# Altium PCB PCB1.pcbdoc (part 1 of 2)
Units mil, origin at the board's own origin, x right, y up, seen from the top; angles counter-clockwise.
Board outline 3346.4 x 3346.4 mil, 4 copper layers (Top Layer, Inner1, Inner2, Bottom Layer), stack 62.5 mil thick; 85 components, 61 nets, 352 pads, 250 vias.
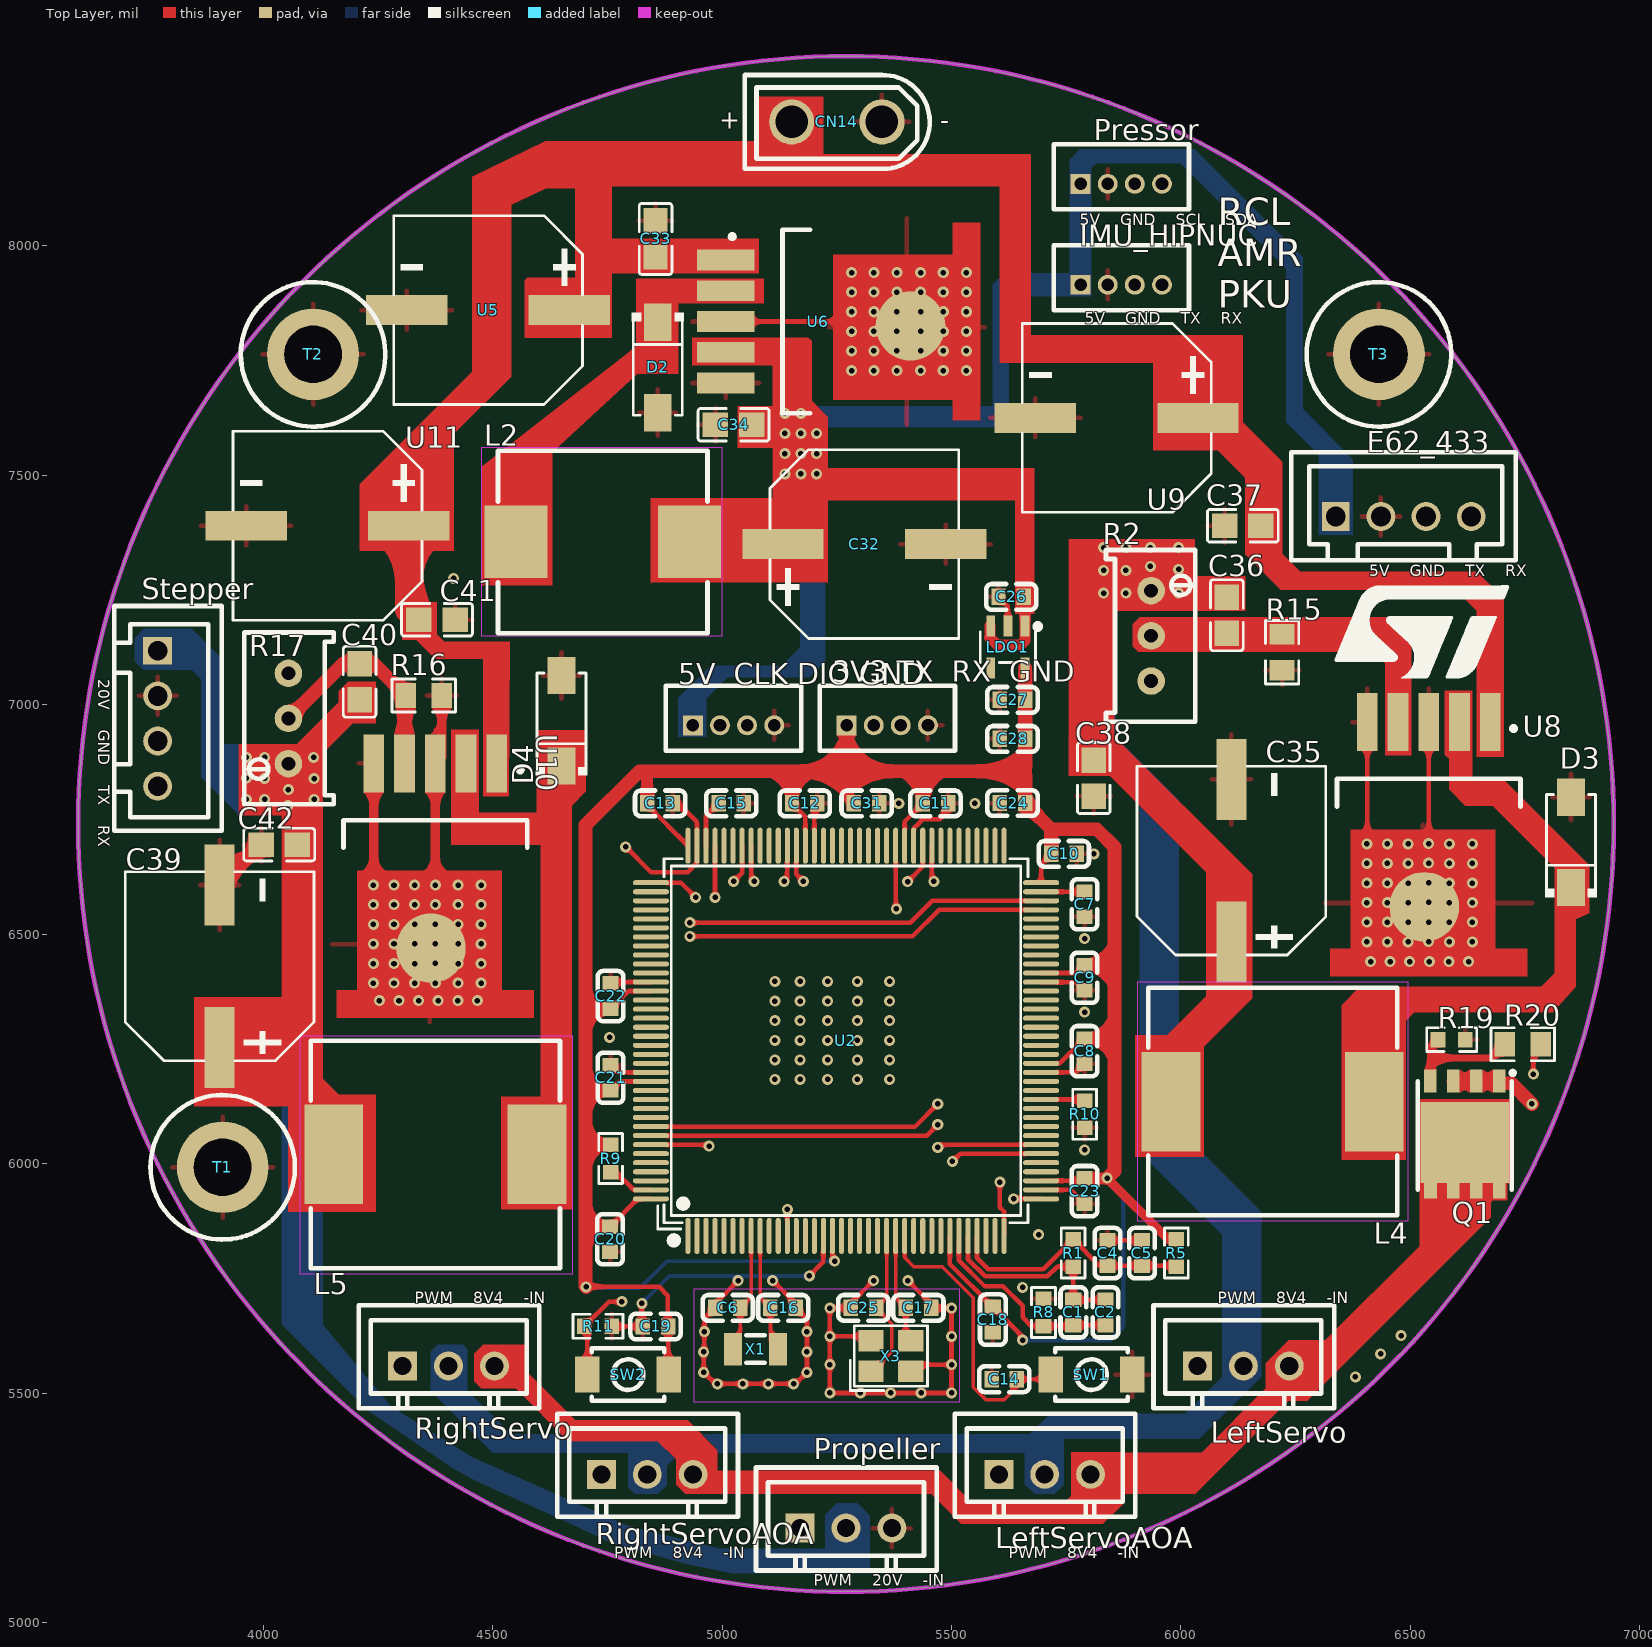
[diagram p0: Top Layer view]
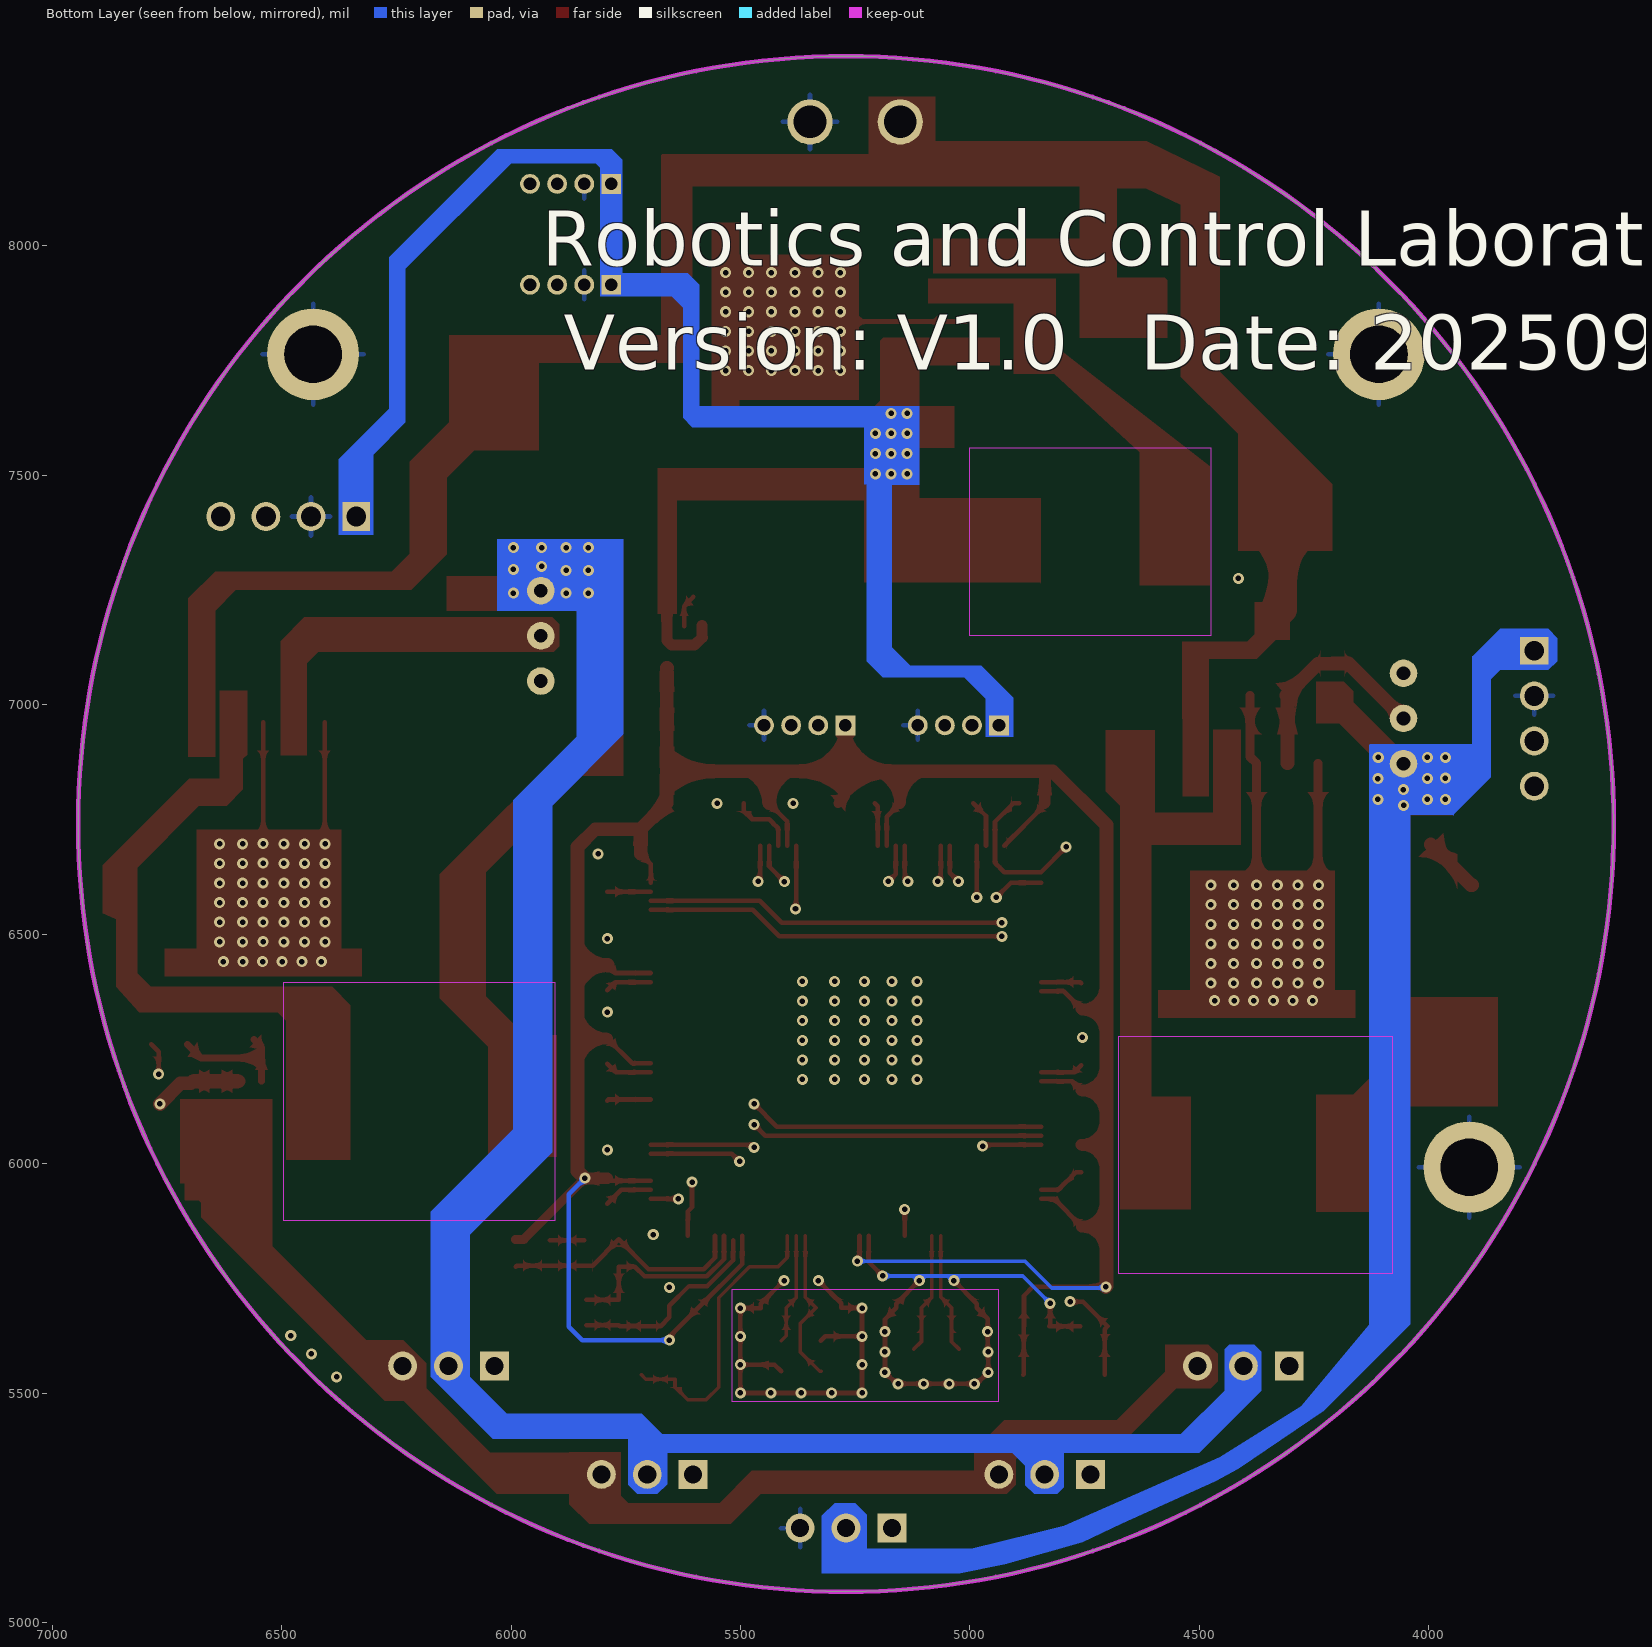
[diagram p1: Bottom Layer view, seen from below]
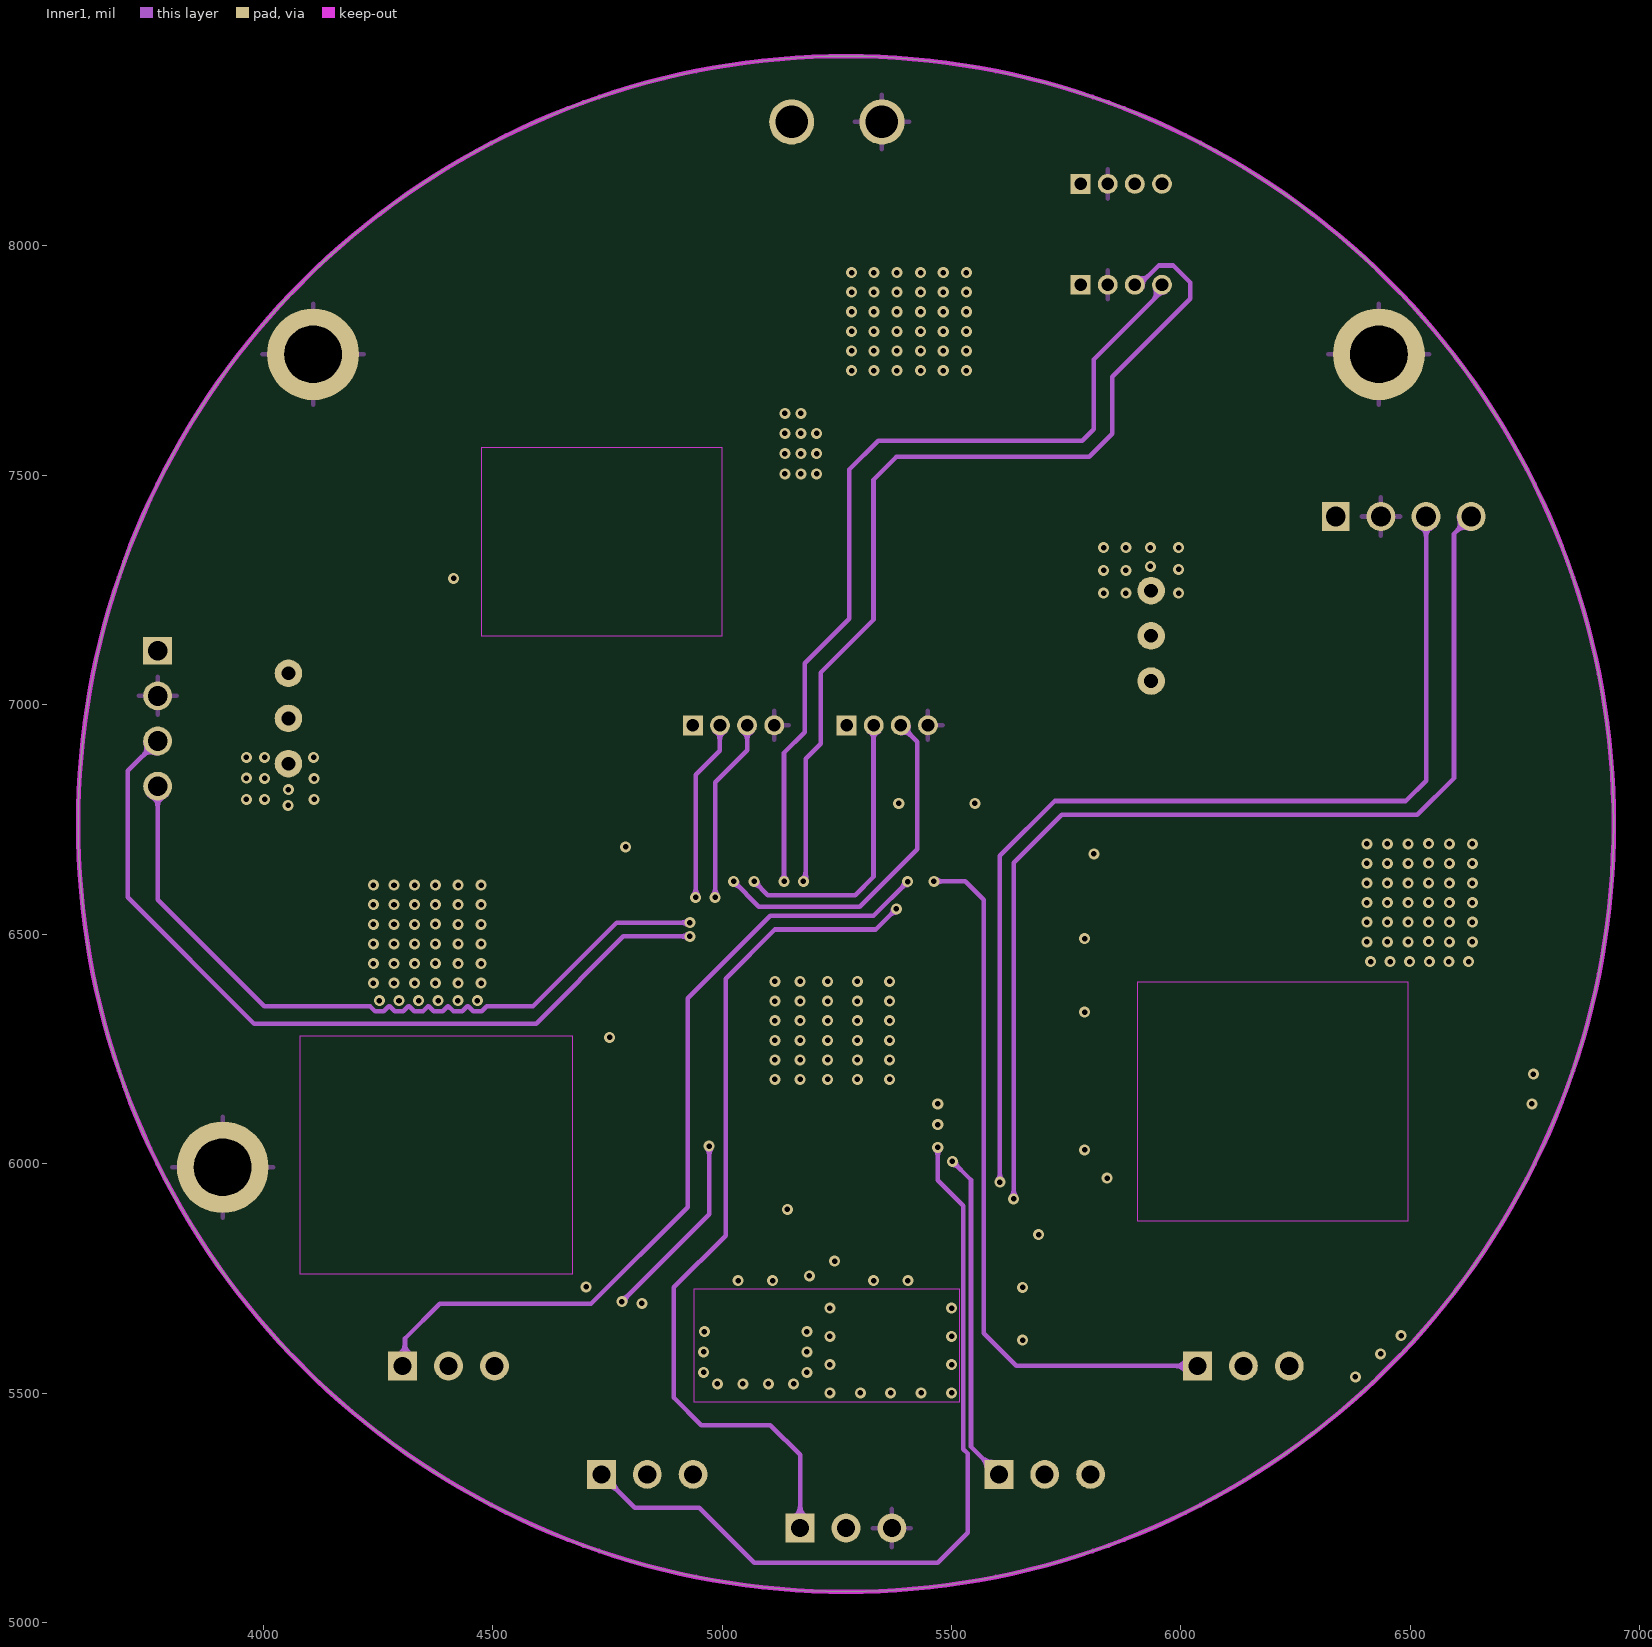
[diagram p2: Inner1]
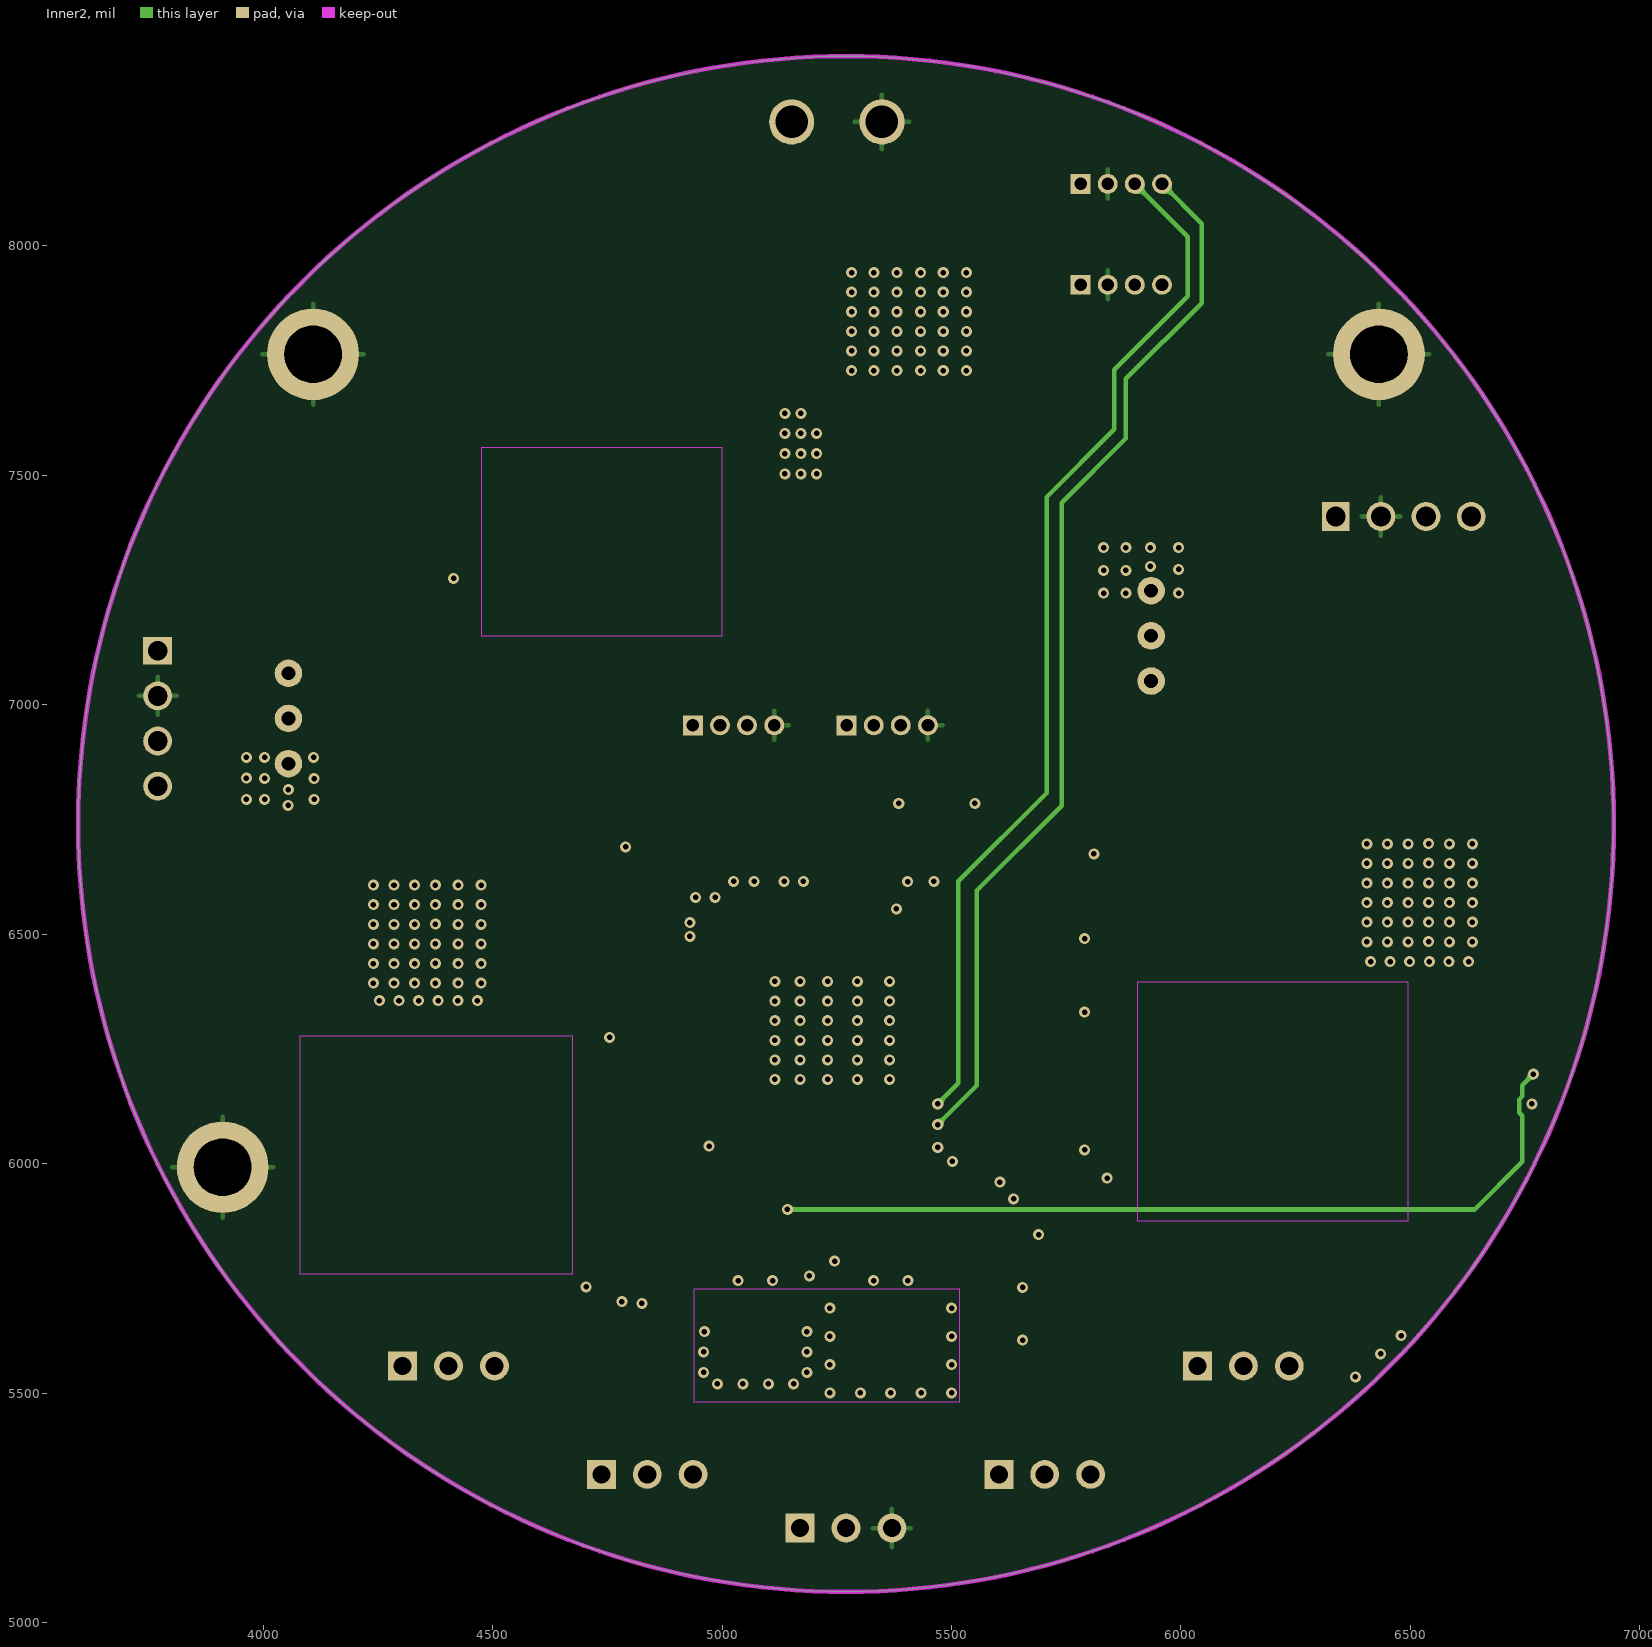
[diagram p3: Inner2]

## Layer stack, top to bottom
Top Layer: signal copper 1.4
Dielectric1: surface 8.3, 7628 RC49% 8.6mil, Dk 0
Inner1: signal copper 0.6
Dielectric2: surface 41.9, 1.1mm H/HOZ Copper, Dk 0
Inner2: signal copper 0.6
Dielectric3: surface 8.3, 7628 RC49% 8.6mil, Dk 0
Bottom Layer: signal copper 1.4

## Board outline
6943.2,6740.2 ccw(c5270,6740.2) 3596.8,6740.2 ccw(c5270,6740.2)

## Design rules (kind name [scope] priority, off if disabled: settings)
BoardOutlineClearance copperThickness1oz [All] p0: genericclearance=10 ignorepadtopadclearanceinfootprint=FALSE except(0: Arc-SplitContinuation Track-SplitContinuation SMDPad-SplitContinuation THPad-SplitContinuation Via-SplitContinuation Fill-SplitContinuation Poly-SplitContinuation Region-SplitContinuation Text-SplitContinuation)
BoardOutlineClearance copperThickness2oz [All] p0: genericclearance=10 ignorepadtopadclearanceinfootprint=FALSE except(0: Arc-SplitContinuation Track-SplitContinuation SMDPad-SplitContinuation THPad-SplitContinuation Via-SplitContinuation Fill-SplitContinuation Poly-SplitContinuation Region-SplitContinuation Text-SplitContinuation)
BoardOutlineClearance Plane_innerPlane [All] p0: genericclearance=10 ignorepadtopadclearanceinfootprint=FALSE except(0: Arc-SplitContinuation Track-SplitContinuation SMDPad-SplitContinuation THPad-SplitContinuation Via-SplitContinuation Fill-SplitContinuation Poly-SplitContinuation Region-SplitContinuation Text-SplitContinuation)
BoardOutlineClearance Copper_copperRegion [All] p0: genericclearance=10 ignorepadtopadclearanceinfootprint=FALSE except(0: Arc-SplitContinuation Track-SplitContinuation SMDPad-SplitContinuation THPad-SplitContinuation Via-SplitContinuation Fill-SplitContinuation Poly-SplitContinuation Region-SplitContinuation Text-SplitContinuation)
BoardOutlineClearance Copper_copperRegion1 [All] p0: genericclearance=10 ignorepadtopadclearanceinfootprint=FALSE except(0: Arc-SplitContinuation Track-SplitContinuation SMDPad-SplitContinuation THPad-SplitContinuation Via-SplitContinuation Fill-SplitContinuation Poly-SplitContinuation Region-SplitContinuation Text-SplitContinuation)
BoardOutlineClearance otherClearance [All] p0: genericclearance=10 ignorepadtopadclearanceinfootprint=FALSE except(0: Arc-SplitContinuation Track-SplitContinuation SMDPad-SplitContinuation THPad-SplitContinuation Via-SplitContinuation Fill-SplitContinuation Poly-SplitContinuation Region-SplitContinuation Text-SplitContinuation)
Clearance copperThickness1oz [All] p1: gap=7 ignorepadtopadclearanceinfootprint=FALSE
Clearance copperThickness2oz [All] p1: gap=7 ignorepadtopadclearanceinfootprint=FALSE
Clearance Plane_innerPlane [All] p1: gap=7 ignorepadtopadclearanceinfootprint=FALSE
Clearance Copper_copperRegion [All] p1: gap=7 ignorepadtopadclearanceinfootprint=FALSE
Clearance Copper_copperRegion1 [All] p1: gap=7 ignorepadtopadclearanceinfootprint=FALSE
Clearance otherClearance [All] p1: gap=7 ignorepadtopadclearanceinfootprint=FALSE
DiffPairsRouting differentialPair [All] p1: maxuncoupledlength=10 minlimit=6 maxlimit=Infinity mostfreqgap=6 toplayer_minwidth=5 toplayer_prefwidth=10 toplayer_maxwidth=100 bottomlayer_minwidth=5 bottomlayer_prefwidth=10 bottomlayer_maxwidth=100 midlayer1_minwidth=5 midlayer1_prefwidth=10 midlayer1_maxwidth=100 midlayer2_minwidth=5 midlayer2_prefwidth=10 midlayer2_maxwidth=100
PasteMaskExpansion pasteMaskExpansion [All] p1: expansion=0
PlaneConnect innerPlane [All] p1: planeconnectstyle=Relief reliefexpansion=20 reliefentries=4 reliefconductorwidth=10 reliefairgap=10
PolygonConnect copperRegion [All] p1: connectstyle=Relief reliefentries=4 reliefconductorwidth=10 polygonreliefangle="90 Angle" airgapwidth=10
PolygonConnect copperRegion1 [All] p1: connectstyle=Direct reliefentries=4 reliefconductorwidth=10 polygonreliefangle="90 Angle" airgapwidth=10
RoutingVias viaSize [All] p1: viastyle="Through Hole" holewidth=12.0078 minholewidth=11.811 maxholewidth=248.0314 width=12.0078 minwidth=11.811 maxwidth=248.0314
SolderMaskExpansion solderMaskExpansion [IsVia] p1: useseparateexpansions=TRUE expansion=-1000 expansionbottom=-1000
SolderMaskExpansion solderMaskExpansion [All] p2: useseparateexpansions=TRUE expansion=2 expansionbottom=2
Width copperThickness1oz [All] p1: maxlimit=100 minlimit=5 preferedwidth=10
Width copperThickness2oz [All] p1: maxlimit=100 minlimit=8 preferedwidth=10

## Components (designator, comment, footprint, x,y, rotation, side; value= is the part's Value field where it differs from the comment)
"3V3 TX  RX  GND" "ZX-ZH1.5-ZZ4P" CONN-TH_4P-P1.50_ZX-ZH1.5-ZZ4P 5360,6955.2 r0 top
"5V  CLK DIO GND" "ZX-ZH1.5-ZZ4P" CONN-TH_4P-P1.50_ZX-ZH1.5-ZZ4P 5025,6955.2 r0 top
C1 "100nF" C0603#1 5765.5,5675.7 r90 top
C2 "1uF" C0603#1 5835.5,5675.7 r90 top
C4 "100nF" C0603#1 5840,5805.2 r90 top
C5 "1uF" C0603#1 5915,5805.2 r90 top
C6 "10pF" C0603#2 5012.4,5685.8 r180 top locked
C7 "2.2uF" C0603#2 5790,6565.2 r270 top
C8 "100nF" C0603#1 5790,6245.2 r90 top
C9 "100nF" C0603#1 5790,6405.2 r90 top
C10 "100nF" C0603#3 5745,6675.2 r180 top
C11 "100nF" C0603#3 5465,6785.2 r180 top
C12 "100nF" C0603#3 5180,6785.2 r180 top
C13 "100nF" C0603#3 4865,6785.2 r180 top
C14 "100nF" C0603#3 5615,5530.2 r180 top
C15 "2.2uF" C0603#1 5019.9,6785.2 r0 top
C16 "10pF" C0603#2 5132.9,5685.8 r0 top locked
C17 "20pF" C0603#1 5427.9,5685.8 r180 top locked
C18 "100nF" C0603#1 5590,5660.2 r90 top
C19 "100nF" C0603#3 4855,5645.2 r0 top
C20 "100nF" C0603#1 4755.9,5835.2 r90 top
C21 "100nF" C0603#1 4757,6187 r270 top
C22 "100nF" C0603#2 4757,6365.2 r270 top
C23 "100nF" C0603#1 5790,5940.2 r90 top
C24 "10uF" C0603#2 5632.9,6785.8 r0 top
C25 "20pF" C0603#1 5307.9,5685.8 r180 top locked
C26 "1uF" C0603#3 5630,7235.2 r0 top
C27 "1uF" C0603#2 5632.9,7010.8 r0 top
C28 "100nF" C0603#2 5632.9,6925.8 r0 top
C31 "100nF" C0603#3 5315,6785.2 r180 top
C32 "330uF" CAP-SMD_BD10.0-L10.3-W10.3-LS10.8-FD#1 5310,7350.2 r0 top
C33 "100nF" C0805#1 4855,8015.2 r270 top
C34 "100nF" C0805#2 5025,7610.2 r0 top
C35 "330uF" CAP-SMD_BD10.0-L10.3-W10.3-LS10.8-FD#2 6110,6660.2 r90 top
C36 "100nF" C0805#1 6100,7195.2 r270 top
C37 "100nF" C0805#2 6135,7390.2 r0 top
C38 "100nF" C0805#3 5810,6840.2 r90 top
C39 "330uF" CAP-SMD_BD10.0-L10.3-W10.3-LS10.8-FD#2 3905,6430.2 r90 top
C40 "100nF" C0805#3 4210,7050.2 r90 top
C41 "100nF" C0805#3 4378.7,7185.2 r180 top
C42 "100nF" C0805#2 4035,6695.2 r0 top
CN14 "XT30UPB-M" CONN-TH_XT30UPB-M 5250,8270.2 r180 top
D2 "SS54" SMA_L4.4-W2.8-LS5.4-R-RD#1 4860,7735.2 r270 top
D3 "SS54" SMA_L4.4-W2.8-LS5.4-R-RD#2 6850,6700.2 r90 top
D4 "SS54" SMA_L4.4-W2.8-LS5.4-R-RD#2 4650,6965.2 r90 top
E62_433 "ZX-XH2.54-4PZZ" CONN-TH_4P-P2.50_4PIN#1 6485,7410.2 r0 top
IMU_HIPNUC "ZX-ZH1.5-ZZ4P" CONN-TH_4P-P1.50_ZX-ZH1.5-ZZ4P 5870,7915.2 r0 top
L2 "33uH" IND-SMD_L11.6-W10.1 4740,7355.2 r0 top
L4 "68uH" IND-SMD_L13.5-W12.6_XR_XR1265 6200,6135.2 r180 top
L5 "68uH" IND-SMD_L13.5-W12.6_XR_XR1265 4375,6020.2 r180 top
LDO1 "ME6211C33M5G-N" SOT-23-5_L3.0-W1.7-P0.95-LS2.8-BL 5622.9,7125.8 r180 top
LeftServo "ZX-XH2.54-3PZZ" CONN-TH_3P-P2.54_2501S-3P 6136.1,5559.1 r0 top locked
LeftServoAOA "ZX-XH2.54-3PZZ" CONN-TH_3P-P2.54_2501S-3P 5703.1,5322.8 r0 top locked
Pressor "ZX-ZH1.5-ZZ4P" CONN-TH_4P-P1.50_ZX-ZH1.5-ZZ4P 5870,8135.2 r0 top
Propeller "ZX-XH2.54-3PZZ" CONN-TH_3P-P2.54_2501S-3P 5270,5205.8 r0 top locked
Q1 "CSD18540Q5B" VSON-CLIP-8_L5.0-W6.0-P1.27-BL 6618.6,6061.5 r180 top
R1 "0Ω" R0603#1 5765,5805.2 r90 top
R2 "1MΩ" RES-ADJ-TH_3P-L10.0-W10.0-P2.50-BL-BS#1 5935,7150.2 r0 top
R5 "0Ω" R0603#1 5990,5805.2 r90 top
R8 "0Ω" R0603#2 5700.5,5675.7 r270 top
R9 "0Ω" R0603#3 4757,6011.1 r90 top
R10 "10kΩ" R0603#1 5790,6107.7 r90 top
R11 "10kΩ" R0603#2 4729.7,5645.5 r180 top
R15 "1kΩ" R0805#1 6220.6,7114.5 r270 top
R16 "1kΩ" R0805#2 4350,7020.2 r0 top
R17 "1MΩ" RES-ADJ-TH_3P-L10.0-W10.0-P2.50-BL-BS#2 4055,6970.2 r180 top
R19 "10kΩ" R0603#3 6590,6270.2 r180 top
R20 "1kΩ" R0805#2 6745,6260.2 r0 top
RightServo "ZX-XH2.54-3PZZ" CONN-TH_3P-P2.54_2501S-3P 4403.9,5559.1 r0 top locked
RightServoAOA "ZX-XH2.54-3PZZ" CONN-TH_3P-P2.54_2501S-3P 4836.9,5322.8 r0 top locked
Stepper "ZX-XH2.54-4PZZ" CONN-TH_4P-P2.50_4PIN#2 3770,6970.2 r270 top
SW1 "GT-TC029B-H020-L1N" SW-SMD_L3.9-W2.9-P4.15-LS5.0 5805,5540.2 r180 top
SW2 "GT-TC029B-H020-L1N" SW-SMD_L3.9-W2.9-P4.15-LS5.0 4795,5540.2 r180 top
T1 "M2_M3" M3X16+6_L 3911.7,5992.1 r0 top
T2 "M2_M3" M3X16+6_L 4108.6,7763.8 r0 top
T3 "M2_M3" M3X16+6_L 6431.4,7763.8 r0 top
U2 "STM32F407ZGT6" LQFP-144_L20.0-W20.0-P0.50-LS22.0-BL 5270,6267.7 r0 top locked
U5 "220uF" CAP-SMD_BD10.0-L10.3-W10.3-FD 4490,7860.2 r180 top
U6 "LM2596SX-5.0/NOPB" TO-263-5_L10.2-W8.9-P1.70-TL#1 5205,7835.2 r0 top
U8 "LM2596SX-ADJ/NOPB" TO-263-5_L10.2-W8.9-P1.70-TL#2 6540,6765.2 r270 top
U9 "220uF" CAP-SMD_BD10.0-L10.3-W10.3-FD 5860,7625.2 r180 top
U10 "LM2596SX-ADJ/NOPB" TO-263-5_L10.2-W8.9-P1.70-TL#2 4375,6675.2 r270 top
U11 "220uF" CAP-SMD_BD10.0-L10.3-W10.3-FD 4140,7390.2 r180 top
X1 "32.768kHz" FC-135R_L3.2-W1.5 5072.9,5595.8 r0 top locked
X3 "8MHz" CRYSTAL-SMD_4P-L3.2-W2.5-BL 5367.9,5580.8 r0 top locked

## Footprints (in the part's own frame and the unit in brackets; to place one, negate y for a bottom-side part, rotate by r counter-clockwise, add the part's x,y. Pads: shape width x height; smd on the part's side, far side on the other; paste and mask are expansions set on the pad)
C0603#1 [mil]
  rect 31.5x35.4 smd: 1(-27.6,0) 2(27.5,0)
  silkscreen extent -55,-28 55,28
C0603#2 [mil]
  rect 31.5x35.4 smd: 1(-27.5,0) 2(27.6,0)
  silkscreen extent -55,-28 55,28
C0603#3 [mil]
  rect 31.5x35.4 smd: 1(-27.6,0) 2(27.6,0)
  silkscreen extent -55,-28 55,28
C0805#1 [mil]
  rect 55.5x53.1 smd paste-3937 mask+2: 1(-39.3,0) 2(39.4,0)
  silkscreen extent -77,-36 77,36
C0805#2 [mil]
  rect 55.5x53.1 smd paste-3937 mask+2: 1(-39.4,0) 2(39.4,0)
  silkscreen extent -77,-36 77,36
C0805#3 [mil]
  rect 55.5x53.1 smd paste-3937 mask+2: 1(-39.4,0) 2(39.3,0)
  silkscreen extent -77,-36 77,36
CAP-SMD_BD10.0-L10.3-W10.3-FD [mil]
  rect 177.2x65 smd: 1(-177.2,0) 2(177.2,0)
  silkscreen extent -206,-206 206,206
CAP-SMD_BD10.0-L10.3-W10.3-LS10.8-FD#1 [mil]
  rect 177.2x65 smd: 1(-177.2,0) 2(177.2,0)
  silkscreen extent -206,-206 206,206
CAP-SMD_BD10.0-L10.3-W10.3-LS10.8-FD#2 [mil]
  rect 177.2x65 smd: 1(-177.2,0) 2(177.1,0)
  silkscreen extent -206,-206 206,206
CONN-TH_3P-P2.54_2501S-3P [mil]
  rect 63x63 hole 39.4: 1(-100,0)
  round 63 hole 39.4: 2(0,0) 3(100,0)
  silkscreen extent -196,-92 198,132
CONN-TH_4P-P1.50_ZX-ZH1.5-ZZ4P [mil]
  rect 43.3x43.3 hole 27.6 paste+0 mask+2: 1(-88.6,0)
  round 43.3 hole 27.6 paste+0 mask+2: 2(-29.5,0) 3(29.5,0) 4(88.6,0)
  silkscreen extent -148,-55 148,87
CONN-TH_4P-P2.50_4PIN#1 [mil]
  rect 60x63 hole 43.3: 1(-147.6,0)
  round 63 hole 43.3: 2(-49.2,0) 3(49.2,0) 4(147.6,0)
  silkscreen extent -245,-95 245,140
CONN-TH_4P-P2.50_4PIN#2 [mil]
  rect 60x63 hole 43.3: 1(-147.6,0)
  round 63 hole 43.3: 2(-49.2,0) 3(49.3,0) 4(147.7,0)
  silkscreen extent -245,-95 245,140
CONN-TH_XT30UPB-M [mil]
  round 98.4 hole 70.9: 1(-98.4,0) 2(98.4,0)
  silkscreen extent -202,-102 201,102
CRYSTAL-SMD_4P-L3.2-W2.5-BL [mil]
  rect 55.1x47.2 smd: 1(-43.3,-33.5) 2(43.3,-33.5) 3(43.3,33.4) 4(-43.3,33.4)
  silkscreen extent -89,-75 80,66
FC-135R_L3.2-W1.5 [mil]
  rect 39.4x70.9 smd: 1(-49.2,0) 2(49.2,0)
  silkscreen extent -20,-30 20,30
IND-SMD_L11.6-W10.1 [mil]
  rect 137.8x157.5 smd: 1(-189,0) 2(189,0)
  silkscreen extent -228,-199 228,199
IND-SMD_L13.5-W12.6_XR_XR1265 [mil]
  rect 128x216.5 smd: 1(-221.5,0) 2(221.5,0)
  silkscreen extent -272,-248 272,248
LQFP-144_L20.0-W20.0-P0.50-LS22.0-BL [mil]
  oval 11x78.7 smd: 1(-344.5,-425.2) 2(-324.8,-425.2) 3(-305.1,-425.2) 4(-285.4,-425.2) 5(-265.7,-425.2) 6(-246.1,-425.2) 7(-226.4,-425.2) 8(-206.7,-425.2) 9(-187,-425.2) 10(-167.3,-425.2) 11(-147.6,-425.2) 12(-127.9,-425.2) 13(-108.3,-425.2) 14(-88.6,-425.2) 15(-68.9,-425.2) 16(-49.2,-425.2) 17(-29.5,-425.2) 18(-9.8,-425.2) 19(9.8,-425.2) 20(29.5,-425.2) 21(49.2,-425.2) 22(68.9,-425.2) 23(88.6,-425.2) 24(108.3,-425.2) 25(127.9,-425.2) 26(147.6,-425.2) 27(167.3,-425.2) 28(187,-425.2) 29(206.7,-425.2) 30(226.4,-425.2) 31(246.1,-425.2) 32(265.8,-425.2) 33(285.4,-425.2) 34(305.1,-425.2) 35(324.8,-425.2) 36(344.5,-425.2) 73(344.5,425.2) 74(324.8,425.2) 75(305.1,425.2) 76(285.4,425.2) 77(265.8,425.2) 78(246.1,425.2) 79(226.4,425.2) 80(206.7,425.2) 81(187,425.2) 82(167.3,425.2) 83(147.6,425.2) 84(127.9,425.2) 85(108.3,425.2) 86(88.6,425.2) 87(68.9,425.2) 88(49.2,425.2) 89(29.5,425.2) 90(9.8,425.2) 91(-9.8,425.2) 92(-29.5,425.2) 93(-49.2,425.2) 94(-68.9,425.2) 95(-88.6,425.2) 96(-108.3,425.2) 97(-127.9,425.2) 98(-147.6,425.2) 99(-167.3,425.2) 100(-187,425.2) 101(-206.7,425.2) 102(-226.4,425.2) 103(-246.1,425.2) 104(-265.7,425.2) 105(-285.4,425.2) 106(-305.1,425.2) 107(-324.8,425.2) 108(-344.5,425.2)
  oval 78.7x11 smd: 37(425.2,-344.5) 38(425.2,-324.8) 39(425.2,-305.1) 40(425.2,-285.4) 41(425.2,-265.7) 42(425.2,-246) 43(425.2,-226.4) 44(425.2,-206.7) 45(425.2,-187) 46(425.2,-167.3) 47(425.2,-147.6) 48(425.2,-127.9) 49(425.2,-108.3) 50(425.2,-88.6) 51(425.2,-68.9) 52(425.2,-49.2) 53(425.2,-29.5) 54(425.2,-9.8) 55(425.2,9.9) 56(425.2,29.5) 57(425.2,49.2) 58(425.2,68.9) 59(425.2,88.6) 60(425.2,108.3) 61(425.2,128) 62(425.2,147.7) 63(425.2,167.3) 64(425.2,187) 65(425.2,206.7) 66(425.2,226.4) 67(425.2,246.1) 68(425.2,265.8) 69(425.2,285.4) 70(425.2,305.1) 71(425.2,324.8) 72(425.2,344.5) 109(-425.2,344.5) 110(-425.2,324.8) 111(-425.2,305.1) 112(-425.2,285.4) 113(-425.2,265.8) 114(-425.2,246.1) 115(-425.2,226.4) 116(-425.2,206.7) 117(-425.2,187) 118(-425.2,167.3) 119(-425.2,147.7) 120(-425.2,128) 121(-425.2,108.3) 122(-425.2,88.6) 123(-425.2,68.9) 124(-425.2,49.2) 125(-425.2,29.5) 126(-425.2,9.9) 127(-425.2,-9.8) 128(-425.2,-29.5) 129(-425.2,-49.2) 130(-425.2,-68.9) 131(-425.2,-88.6) 132(-425.2,-108.3) 133(-425.2,-127.9) 134(-425.2,-147.6) 135(-425.2,-167.3) 136(-425.2,-187) 137(-425.2,-206.7) 138(-425.2,-226.4) 139(-425.2,-246) 140(-425.2,-265.7) 141(-425.2,-285.4) 142(-425.2,-305.1) 143(-425.2,-324.8) 144(-425.2,-344.5)
  silkscreen extent -410,-443 397,397
M3X16+6_L [mil]
  round 200 hole 125 slot 125.2 at 0 deg paste+0 mask+2: 1(0,0)
  silkscreen extent -157,-158 157,157
R0603#1 [mil]
  rect 31.8x34 smd paste-3937 mask+2: 1(-29.7,0) 2(29.6,0)
  silkscreen extent -55,-26 54,26
R0603#2 [mil]
  rect 31.8x34 smd paste-3937 mask+2: 1(-29.6,0) 2(29.7,0)
  silkscreen extent -55,-26 55,26
R0603#3 [mil]
  rect 31.8x34 smd paste-3937 mask+2: 1(-29.7,0) 2(29.7,0)
  silkscreen extent -54,-26 54,26
R0805#1 [mil]
  rect 44.6x54.2 smd paste-3937 mask+2: 1(-39.4,0) 2(39.3,0)
  silkscreen extent -69,-36 69,36
R0805#2 [mil]
  rect 44.6x54.2 smd paste-3937 mask+2: 1(-39.4,0) 2(39.4,0)
  silkscreen extent -69,-36 69,36
RES-ADJ-TH_3P-L10.0-W10.0-P2.50-BL-BS#1 [mil]
  round 60 hole 30: 1(0,98.4) 2(0,0) 3(0,-98.5)
  silkscreen extent -98,-187 96,187
RES-ADJ-TH_3P-L10.0-W10.0-P2.50-BL-BS#2 [mil]
  round 60 hole 30: 1(0,98.5) 2(0,0) 3(0,-98.4)
  silkscreen extent -98,-187 97,187
SMA_L4.4-W2.8-LS5.4-R-RD#1 [mil]
  rect 81.2x60.6 smd: 1(98.6,0) 2(-98.5,0)
  silkscreen extent -119,-56 104,56
SMA_L4.4-W2.8-LS5.4-R-RD#2 [mil]
  rect 81.2x60.6 smd: 1(98.5,0) 2(-98.6,0)
  silkscreen extent -119,-56 104,56
SOT-23-5_L3.0-W1.7-P0.95-LS2.8-BL [mil]
  rect 19.3x45.6 smd: 1(-37.4,-45.4) 2(0,-45.4) 3(37.4,-45.4)
  rect 19.3x46.3 smd: 4(37.4,45.5) 5(-37.4,45.5)
  silkscreen extent -71,-51 60,34
SW-SMD_L3.9-W2.9-P4.15-LS5.0 [mil]
  rect 53.1x78.7 smd: 1(-88.6,0) 2(88.6,0)
  silkscreen extent -79,-57 79,57
TO-263-5_L10.2-W8.9-P1.70-TL#1 [mil]
  rect 126x45.3 smd: 1(-197.2,134) 2(-197.2,67) 3(-197.2,0) 4(-197.2,-67) 5(-197.2,-134)
  round 151.7 smd: 6(205.5,-9.5)
  Top Layer region: 37.2,145 297.2,145 297.2,215 357.2,215 357.2,-215 297.2,-215 297.2,-170 37.2,-170
  silkscreen extent -188,-200 -13,200
TO-263-5_L10.2-W8.9-P1.70-TL#2 [mil]
  rect 126x45.3 smd: 1(-197.1,134) 2(-197.1,67) 3(-197.1,0) 4(-197.1,-67) 5(-197.1,-134)
  round 151.7 smd: 6(205.5,-9.5)
  Top Layer region: 37.2,145 297.2,145 297.2,215 357.2,215 357.2,-215 297.2,-215 297.2,-170 37.2,-170
  silkscreen extent -188,-200 -13,200
VSON-CLIP-8_L5.0-W6.0-P1.27-BL [mil]
  rect 27.6x50 smd paste-3937 mask+2: 1(-75,-118.1) 2(-25.1,-118.1) 3(25,-118.1) 4(75,-118.1)
  rect 27.6x39.4 smd paste-3937 mask+2: 5(74.9,118.2) 6(24.9,118.2) 7(-25.1,118.2) 8(-75.1,118.2)
  rect 192.9x177.2 smd paste-3937 mask+2: 8(-0.1,15.4)
  silkscreen extent -108,-140 102,118

## Via types
v1: diameter 24, hole 12, Top Layer to Bottom Layer, 250 vias

## Nets (pads, with @x,y where several pads share a name; then routed paths per layer and width w, separated by ;. In a path a pad name is that pad's centre, name@x,y a point inside that pad or via, vN(x,y) a via of type N, cw(c..) or ccw(c..) an arc to the next point about the centre after c; other vN are vias at no path point)
$1N1666: C7.1 U2.71 | length 94.9
  Top Layer w10: U2.71@5695.2,6592.5 5789.8,6592.5 C7.1@5790,6592.7
$1N1667: C15.1 U2.106 | length 103.6
  Top Layer w10: U2.106@4964.9,6692.9 4964.9,6757.7 C15.1@4992.3,6785.2
$1N1678: R9.1 U2.143 | length 103.7
  Top Layer w10: R9.1@4757,5981.4 4768.8,5981.4 4807.3,5942.9 U2.143@4844.8,5942.9
$1N12541: D2.2 L2.1 U6.2
$1N20536: D3.2 L4.1 U8.2
$1N20537: C36.2 R2.2 R15.1 U8.4
$1N21067: D4.2 L5.1 U10.2
$1N21068: C40.2 R16.1 R17.2 U10.4 | length 483.3
  Top Layer w30: R17.2@4055,6970.2 4175,7090.2 4209.4,7090.2 C40.2@4210,7089.5 4241.3,7089.5 R16.1@4310.6,7020.2 4308,7017.5 U10.4@4308,6872.3
$1N30618: Q1.4 R19.2 R20.1 | length 271.9
  Top Layer w15: Q1.4@6543.6,6179.6 6543.6,6230.3 ; R19.2@6560.3,6270.2 6543.6,6253.4 6543.6,6230.3 ; R20.1@6705.6,6260.2 6675.7,6230.3 6543.6,6230.3
+3V3: "3V3 TX  RX  GND.1" C8.2 C9.2 C10.2 C11.2 C12.2 C13.2 C18.2 C19.2 C20.2 C21.2 C22.2 C23.2 C24.2 C27.2 C28.2 C31.2 LDO1.5 R5.2 R9.2 SW2.1 U2.17 U2.30 U2.39 U2.52 U2.62 U2.72 U2.84 U2.95 U2.108 U2.121 U2.131 U2.144 | length 7205.4
  Top Layer w10: v1(4703.8,5731.4) 4862.8,5731.4 4882,5712.2 4882,5645.7 C19.2@4882.6,5645.2 4882.6,5541.2 SW2.1@4883.6,5540.2 ; C20.2@4755.9,5862.7 4816.5,5923.2 U2.144@4844.8,5923.2 ; C21.2@4757,6159.5 4776.7,6179.1 U2.131@4844.8,6179.1 ; C22.2@4757,6337.6 4795.4,6376 U2.121@4844.8,6376 ; C13.2@4837.4,6781 U2.108@4925.5,6692.9 ; C12.2@5152.4,6785.2 5181.4,6756.2 U2.95@5181.4,6692.9 ; U2.17@5240.5,5842.5 5240.5,5792.1 v1(5245.1,5787.5) ; U2.84@5397.9,6692.9 5397.9,6745.7 C11.2@5437.4,6785.2 ; U2.30@5496.4,5842.5 5496.4,5781.3 C18.2@5590,5687.7 5655,5622.7 v1(5655,5615.2) ; U2.39@5695.2,5962.6 5784.9,5962.6 C23.2@5790,5967.7 ; U2.52@5695.2,6218.5 5735.8,6218.5 C8.2@5790,6272.7 ; U2.62@5695.2,6415.4 5772.6,6415.4 C9.2@5790,6432.7 ; U2.72@5695.2,6612.2 5695.2,6652.9 C10.2@5717.4,6675.2
  Top Layer w20: 5271.4,6955.2 5271.4,6855.2 5271.4,6801.2 C31.2@5287.4,6785.2 ; v1(5839,5968.2) 5972.3,5834.8 R5.2@5990,5834.8
  Top Layer w25: 4702.5,5862.2 4703,5862.7 C20.2@4755.9,5862.7 ; 4702.5,6042 4703.7,6040.8 R9.2@4757,6040.8 ; 4702.5,6163.4 4706.4,6159.5 C21.2@4757,6159.5 ; 4702.5,6335.4 4754.8,6335.4 C22.2@4757,6337.6 ; 4836.4,6855.2 4836.4,6786.2 C13.2@4837.4,6785.2 ; C12.2@5152.4,6785.2 5152.4,6853.4 5154.2,6855.2 ; C23.2@5790,5967.7 v1@5838.6,5967.7 ; C8.2@5790,6272.7 5854.9,6272.7 5855,6272.8
  Top Layer w30: v1(4703.8,5731.4) 4702.5,5732.7 4702.5,5862.2 4702.5,6042 4702.5,6163.4 4702.5,6335.4 4702.5,6737.7 4820,6855.2 4836.4,6855.2 5154.2,6855.2 5271.4,6855.2 5438.2,6855.2 ; C11.2@5437.4,6785.2 5437.4,6854.4 5438.2,6855.2 ; LDO1.5@5660.3,7080.3 5660.5,7080.2 C27.2@5660.5,7010.8 C28.2@5660.5,6925.8 5660.5,6850 ; C10.2@5717.4,6675.2 5717.4,6728.8 ; C9.2@5790,6432.7 5851.8,6432.7 5855,6429.6 ; v1(5839,5968.2) 5855,5984.2 5855,6272.8 5855,6429.6 ; 5438.2,6855.2 5655.3,6855.2 5660.5,6850 ; 5660.5,6850 C24.2@5660.5,6785.8 5717.4,6728.8 ; 5717.4,6728.8 5816.4,6728.8 5855,6690.2 5855,6429.6
  Bottom Layer w8: v1(4703.8,5731.4) 4706.3,5728.8 4821.3,5728.8 4880,5787.5 v1(5245.1,5787.5)
  Bottom Layer w10: v1(5655,5615.2) 5845,5615.2 5874,5644.2 5874,5933.2 v1(5839,5968.2)
+5V: "5V  CLK DIO GND.1" C26.2 C32.1 C34.2 E62_433.1 IMU_HIPNUC.1 L2.2 LDO1.1 LDO1.3 Pressor.1 U6.4 | length 210.2
  Top Layer w24: LDO1.3@5584.3,7172.4 5584.3,7148.4 5583,7147.1 5600,7130.2 5650,7130.2 5660.3,7140.5 LDO1.1@5660.3,7171.2 5660.3,7232.4 C26.2@5657.6,7235.2
  other v1: 5137,7503.4 5171.5,7503.2 5206,7503.2 5137,7547.3 5171.5,7547.2 5206,7547.2 5137,7591.2 5171.5,7591.2 5206,7591.2 5137,7635.2 5171.5,7635.2
+8V4: C35.1 C36.1 C38.2 L4.2 LeftServo.2 LeftServoAOA.2 R2.1 RightServo.2 RightServoAOA.2
  other v1: 5831.6,7243.3 5880,7243.3 5994.7,7243.3 5831.6,7292.8 5880,7292.8 5994.7,7295.2 5933.3,7301.6 5831.6,7342.2 5880,7342.2 5933.3,7342.2 5994.7,7342.2
+20V: C39.1 C40.1 C42.2 L5.2 Propeller.2 R17.1 Stepper.1
  other v1: 4054.5,6780.7 3963.5,6793.7 4003,6793.7 4111,6793.7 4055,6815.2 4003,6839.4 4111,6839.1 3963.5,6840.2 3963.5,6885.2 4003,6885.2 4110,6885.2
+24V: C33.2 C37.2 C41.2 CN14.2 U5.1 U6.1 U8.1 U9.1 U10.1 U11.1 | length 214.2
  Top Layer w60: U11.1@4317.2,7390.2 4317.2,7207.4 C41.2@4339.4,7185.2
-IN: LeftServo.3 LeftServoAOA.3 Q1.5 Q1.6 Q1.7 Q1.8 RightServo.3 RightServoAOA.3
A0: U2.34
A1: U2.35
A4: U2.40
A5: U2.41
A6: LeftServoAOA.1 U2.42 | length 924.1
  Top Layer w10: v1(5502,6004.9) 5518.8,6021.7 U2.42@5695.2,6021.7
  Inner1 w10: v1(5502,6004.9) 5542.5,5964.3 5542.5,5383.4 LeftServoAOA.1@5603.1,5322.8
A7: RightServoAOA.1 U2.43 | length 1999.4
  Top Layer w10: v1(5470,6035.2) 5476.2,6041.3 U2.43@5695.2,6041.3
  Inner1 w10: RightServoAOA.1@4736.9,5322.8 4809.6,5250.2 4950,5250.2 5070,5130.2 5470,5130.2 5535,5195.2 5535,5368.3 5526,5377.3 5526,5907.8 5470,5963.8 v1(5470,6035.2)
BOOT0: R11.2 SW2.2 U2.138 | length 758
  Top Layer w10: SW2.2@4706.4,5540.2 4706.4,5639.1 R11.2@4700,5645.5 4753.5,5699 v1(4781.4,5699) ; U2.138@4844.8,6041.3 4968.7,6041.3 v1(4972,6038)
  Inner1 w10: v1(4781.4,5699) 4972,5889.6 v1(4972,6038)
BOOT1: R10.2 U2.48 | length 95.9
  Top Layer w10: U2.48@5695.2,6139.8 5787.6,6139.8 R10.2@5790,6137.3
C0: U2.26
C1: U2.27
C12: U2.113
D2: U2.116
D12: LeftServo.1 U2.81 | length 1645.2
  Top Layer w10: U2.81@5457,6692.9 5457,6619.6 v1(5461.5,6615.2)
  Inner1 w10: v1(5461.5,6615.2) 5530,6615.2 5570,6575.2 5570,5630.2 5641.1,5559.1 LeftServo.1@6036.1,5559.1
D13: RightServo.1 U2.82 | length 1928.4
  Top Layer w10: v1(5404.5,6614.6) 5437.3,6647.5 U2.82@5437.3,6692.9
  Inner1 w10: RightServo.1@4303.9,5559.1 4308.9,5564.1 4308.9,5619 4384.3,5694.4 4714.3,5694.4 4925,5905.2 4925,6360.2 5105,6540.2 5330,6540.2 v1(5404.5,6614.6)
D14: Propeller.1 U2.85 | length 2019.3
  Top Layer w10: U2.85@5378.3,6692.9 5378.3,6556.9 v1(5380,6555.2)
  Inner1 w10: Propeller.1@5170,5205.8 5170,5365.2 5105,5430.2 4955,5430.2 4895,5490.2 4895,5730.2 5007.9,5843.1 5007.9,6403.1 5115,6510.2 5335,6510.2 v1(5380,6555.2)
F1: U2.11
F2: R20.2 U2.12 | length 1980.9
  Top Layer w10: U2.12@5142.1,5842.5 v1(5142.1,5900.1) ; v1(6767.9,6195.2) 6767.9,6243.6 R20.2@6784.4,6260.2
  Inner2 w10: v1(5142.1,5900.1) 6639.9,5900.1 6743.7,6003.8 6743.7,6104 6737,6110.6 6737,6139.7 6743.7,6146.4 6743.7,6171 v1(6767.9,6195.2)
F3: U2.13
F4: U2.14
F5: U2.15
F6: U2.18
F7: U2.19
F8: U2.20
F9: U2.21
F10: U2.22